# Altium PCB PCB1.PcbDoc
Units mm, origin at the board's own origin, x right, y up, seen from the top; angles counter-clockwise.
Board outline 100 x 50 mm, 2 copper layers (Top Layer, Bottom Layer), stack 1.98 mm thick; 15 components, 9 nets, 48 pads, 4 vias.
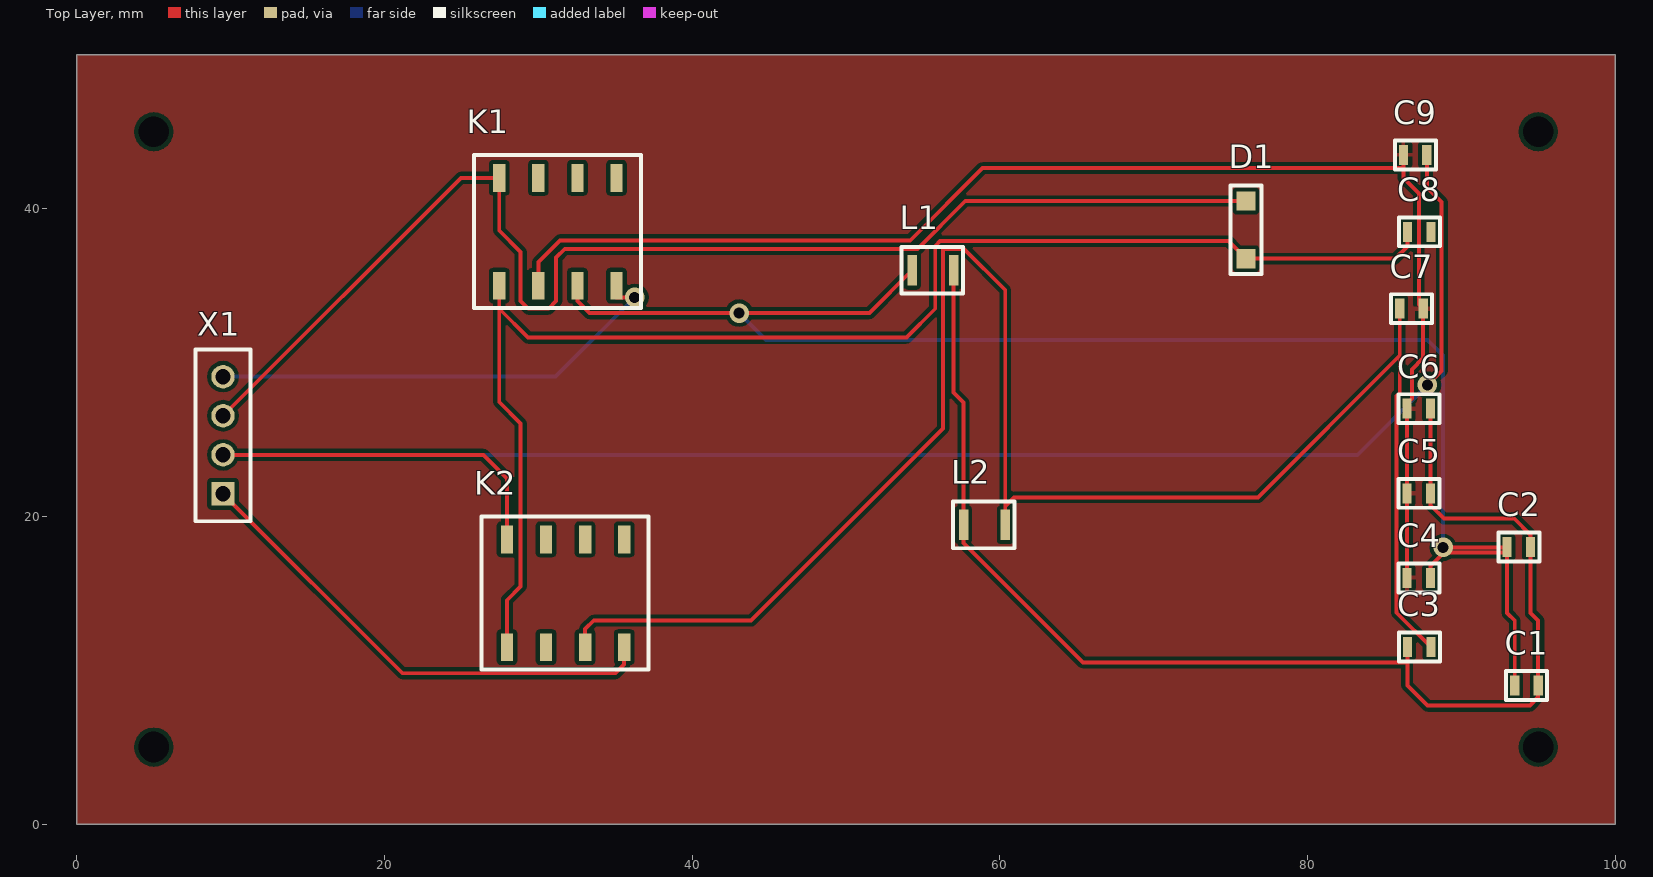
[diagram p0: Top Layer view]
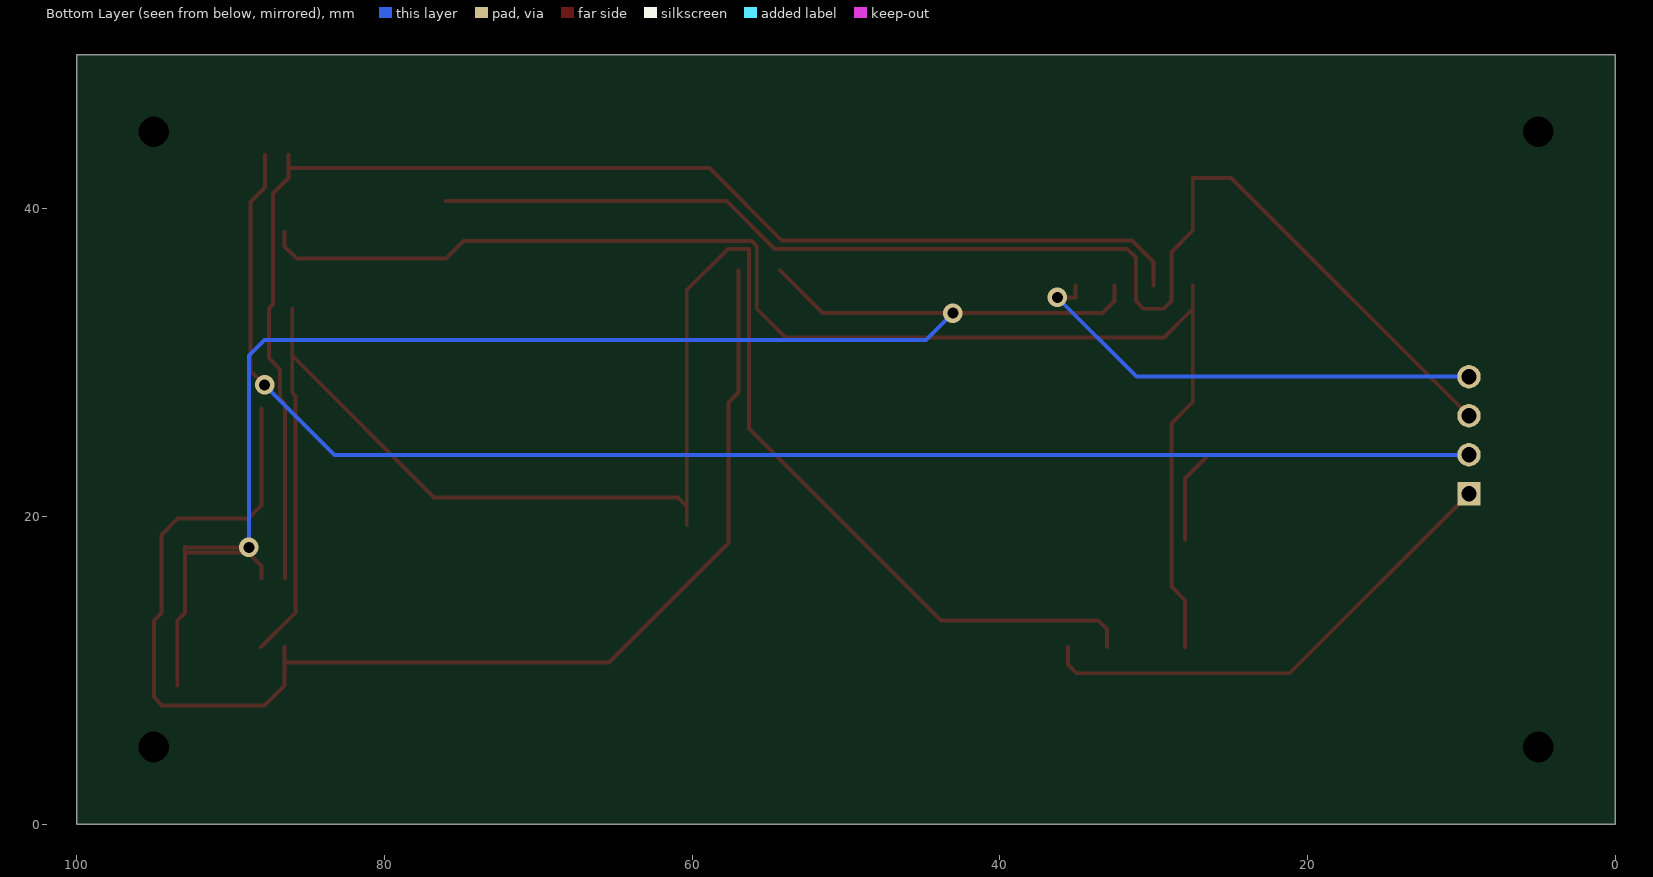
[diagram p1: Bottom Layer view, seen from below]
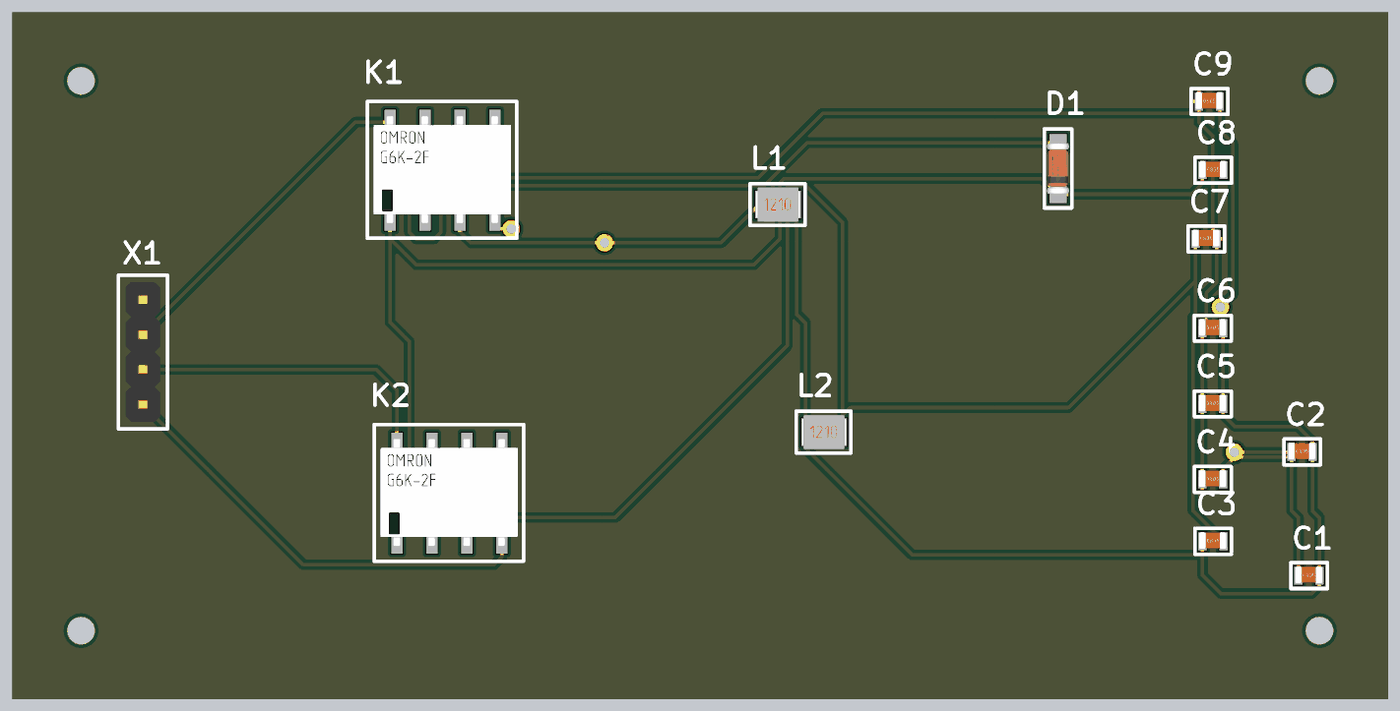
[diagram p2: 3D render of the assembled board from above, using the file's embedded part models]

## Layer stack, top to bottom
Top Solder: solder mask 0.0102, Solder Resist, Dk 3.5
Top Layer: signal copper 0.0356
Dielectric 1: dielectric 1.909, FR-4, Dk 4.8
Bottom Layer: signal copper 0.0356
Bottom Solder: solder mask 0.0102, Solder Resist, Dk 3.5

## Board outline
0,0 100,0 100,50 0,50

## Design rules (kind name [scope] priority, off if disabled: settings)
Clearance [All] p1: gap=0.254 ignorepadtopadclearanceinfootprint=FALSE except(0: Arc-Hole Track-Hole SMDPad-Hole THPad-Hole Via-Hole Fill-Hole Poly-Hole Region-Hole Text-Hole)
PolygonConnect [All] p1: connectstyle=Relief reliefconductorwidth=0.254 reliefentries=4 polygonreliefangle="90 Angle" airgapwidth=0.254
RoomDefinition Sheet1 [InComponentClass('Sheet1')] p1: confinementstyle=ConfineIn formatcopy=TRUE lockcomponents=FALSE outline -125,-125 -74.2,-125 -74.2,-99.6 -125,-99.6
RoutingVias [All] p1: holewidth=0.711 width=1.27 viastyle="Through Hole" minholewidth=0.711 minwidth=1.27 maxholewidth=0.711 maxwidth=1.27
SolderMaskExpansion [All] p1: expansion=0.102
Width [All] p1: maxlimit=0.254 minlimit=0.254 preferedwidth=0.254
30 further rules are at their usual default settings.

## Components (designator, comment, footprint, x,y, rotation, side; value= is the part's Value field where it differs from the comment)
C1 "12пФ-5%-1210" Capacitor_0805 94.238,9 r0 top
C2 "10пФ-10%-1210" Capacitor_0805 93.738,18 r0 top
C3 "10пФ-5%-1210" Capacitor_0805 87.262,11.5 r0 top
C4 "100пФ-5%-1210" Capacitor_0805 87.238,16 r0 top
C5 "150 пФ-5%-1210" Capacitor_0805 87.238,21.5 r0 top
C6 "82пФ-5%-1210" Capacitor_0805 87.238,27 r0 top
C7 "100 пФ-5%-1210" Capacitor_0805 86.762,33.5 r0 top
C8 "0.01 мкФ-10%-1210" Capacitor_0805 87.262,38.5 r0 top
C9 "0.01 мкФ-10%-1210" Capacitor_0805 87,43.5 r0 top
D1 "1N4148" 1N4148_MELF 76,36.75 r90 top
K1 "Relay_G6K-2F" Relay_G6K-2F 27.46,35 r0 top
K2 "Relay_G6K-2F" Relay_G6K-2F 27.96,11.5 r0 top
L1 "0.41 мкГн" Inductor_1210L 55.65,36.05 r0 top
L2 "0.47 мкГн" Inductor_1210L 59,19.5 r0 top
X1 "\"Разъёмы\"" PLS-1x4 9.5,21.46 r90 top

## Footprints (in the part's own frame and the unit in brackets; to place one, negate y for a bottom-side part, rotate by r counter-clockwise, add the part's x,y. Pads: shape width x height; smd on the part's side, far side on the other; paste and mask are expansions set on the pad)
1N4148_MELF [mm]
  rect 1.25x1.25 smd: 1(0,0) 2(3.75,0)
  silkscreen extent -1,-1 4.75,1, body extent 0.02,-0.8 3.72,0.8, height 1.6
Capacitor_0805 [mm]
  rect 0.6x1.3 smd: 0(-0.762,0) 1(0.762,0)
  silkscreen extent -1.32,-0.94 1.35,0.94, body extent -1.02,-0.56 0.98,0.69, height 1.3
Inductor_1210L [mm]
  rect 0.6x2 smd: 1(-1.35,-0.05) 2(1.35,-0.05)
  silkscreen extent -2.03,-1.57 1.96,1.47, body extent -1.6,-1.3 1.6,1.2, height 2.21
PLS-1x4 [mil]
  rect 60x60 hole 39.37: 1(0,0)
  round 60 hole 39.37: 2(100,0) 3(200,0) 4(300,0)
  silkscreen extent -70,-70 370,70, body extent -50,-50 350,50, height 335
Relay_G6K-2F [mm]
  rect 0.8x1.8 smd: 1(0,0) 2(2.54,0) 3(5.08,0) 4(7.62,0) 5(7.62,7) 6(5.08,7) 7(2.54,7) 8(0,7)
  silkscreen extent -1.65,-1.45 9.2,8.5, body extent -1.2,-0.35 8.8,7.45, height 5.21

## Part data
C1: library part Capasitor_SMD1210C, Manufacturer="Kyocera AVX", PartNumber=KGQ32DCG2D120JT, Href=https://www.chipdip.ru/product0/8044209417
C2 C3: library part Capasitor_SMD1210C, Manufacturer="Kemet Electronics", PartNumber=C1210C100K9RACTU, Href=https://www.chipdip.ru/product0/8018630498
C4 C7: library part Capasitor_SMD1210C, Manufacturer="Murata Electronics", PartNumber=GRM32A7U3D101JW31D, Href=https://www.chipdip.ru/product0/8015826902
C5: library part Capasitor_SMD1210C, Manufacturer="Kemet Electronics", PartNumber=C1210X151J1HACAUTO, Href=https://www.chipdip.ru/product0/8007765044
C6: library part Capasitor_SMD1210C, Manufacturer="Murata Electronics", PartNumber=GRM32A7U3D820JW31D, Href=https://www.chipdip.ru/product0/8006256032
C8 C9: library part Capasitor_SMD1210C, Manufacturer="Murata Electronics", PartNumber=GRM32DR72E104KW01L, Href=https://www.chipdip.ru/product/grm32dr72e104k
D1: library part Diode_1N4148
L1 L2: library part Inductor_1210
X1: library part PLS-1x4, PartNumber=DS-1021-1x4SF11-B, Href=https://www.chipdip.ru/product/pls-4?utm_source=direct&utm_medium=cpc&utm_campaign=Y_dinamicheskaya&utm_content=text1_ya&utm_term=---autotargeting&position_type=premium&yclid=14280046024007876607

## Free pads (board coordinates)
  round 0 hole 2: 6(5,5) 6(5,45) 6(95,5) 6(95,45)

## Via types
v1: diameter 1.27, hole 0.711, Top Layer to Bottom Layer, 4 vias

## Nets (pads, with @x,y where several pads share a name; then routed paths per layer and width w, separated by ;. In a path a pad name is that pad's centre, name@x,y a point inside that pad or via, vN(x,y) a via of type N, cw(c..) or ccw(c..) an arc to the next point about the centre after c; other vN are vias at no path point)
GND: C4.0 C5.0 C6.0 C7.1 C9.0 K1.2 | length 88.8
  Top Layer w0.254: K1.2 30,36.544 31.397,37.941 54.178,37.941 58.877,42.64 86.238,42.64 ; C9.0 86.238,42.64 ; C4.0 C5.0 C6.0 86.476,27.35 86.785,27.659 86.785,29.555 87.524,30.294 C7.1 87.242,33.782 87.242,40.989 86.238,41.993 86.238,42.64
NetC1_0: C1.0 C2.0 C4.1 K1.3 L1.1 | length 103.1
  Top Layer w0.254: K1.3 32.54,34.004 33.329,33.215 v1(43.048,33.215) 51.516,33.215 L1.1 ; C4.1 88,16.778 88.868,17.646 C2.0@92.976,17.646 ; v1(88.817,17.977) C2.0@92.976,17.977 ; C2.0 C2.0@92.976,17.977 ; C1.0 93.476,13.227 92.976,13.727 C2.0@92.976,17.646 ; C2.0@92.976,17.646 C2.0@92.976,17.977
  Bottom Layer w0.254: v1(43.048,33.215) 44.799,31.464 87.801,31.464 88.817,30.448 v1(88.817,17.977)
NetC1_1: C1.1 C2.1 C3.0 C5.1 C6.1 L1.2 L2.1 | length 86.2
  Top Layer w0.254: L1.2 57,28.05 57.65,27.4 L2.1 57.65,18.256 65.397,10.509 86.5,10.509 ; C3.0 86.5,10.509 ; C6.1 C5.1 88,20.724 88.868,19.856 93.44,19.856 94.5,18.796 C2.1 94.5,13.727 95,13.227 C1.1 95,8.244 94.456,7.7 87.816,7.7 86.5,9.016 86.5,10.509
NetC3_1: C3.1 C7.0 K2.3 L2.2 | length 114.6
  Top Layer w0.254: K2.3 33.04,12.668 33.6,13.228 43.835,13.228 56.319,25.712 56.319,37.381 57.677,37.381 60.35,34.708 60.35,20.65 ; L2.2 60.35,20.65 ; C7.0 86,30.448 ; C3.1 88.024,11.505 85.795,13.735 85.795,27.83 86,28.035 86,30.448 ; 60.35,20.65 60.928,21.228 76.78,21.228 86,30.448
NetC8_0: C8.0 D1.1 K1.1 K2.1 | length 91
  Top Layer w0.254: K1.1 27.46,33.496 ; K2.1 27.96,14.549 28.848,15.437 28.848,26.038 27.46,27.425 27.46,33.496 ; C8.0 86.5,37.554 85.696,36.75 D1.1 74.861,37.889 56.102,37.889 55.8,37.587 55.8,33.496 53.92,31.616 29.34,31.616 27.46,33.496
NetC9_1: C9.1 K2.8 X1.2 | length 119
  Top Layer w0.254: X1.2 26.431,24 27.96,22.471 K2.8 ; C9.1 87.762,41.384 88.716,40.43 88.716,29.457 v1(87.801,28.543)
  Bottom Layer w0.254: X1.2 83.258,24 v1(87.801,28.543)
NetD1_2: D1.2 K1.8 X1.3 | length 84.8
  Top Layer w0.254: X1.3 24.96,42 K1.8 27.46,38.576 28.848,37.188 28.848,34.004 29.356,33.496 30.651,33.496 31.159,34.004 31.159,36.823 31.718,37.382 54.635,37.382 57.753,40.5 D1.2
NetK1_4: K1.4 X1.4 | length 30.9
  Top Layer w0.254: K1.4 35.08,34.233 v1(36.265,34.233)
  Bottom Layer w0.254: X1.4 31.112,29.08 v1(36.265,34.233)
NetK2_4: K2.4 X1.1 | length 32.3
  Top Layer w0.254: X1.1 21.161,9.799 35.02,9.799 35.58,10.359 K2.4
pads on no net: C8.1 K1.5 K1.6 K1.7 K2.2 K2.5 K2.6 K2.7

## Polygon pours and split planes (outlines as drawn)
GND on Top Layer "Top Layer-No Net" (solid, pour order 6): 100,50 100,0 0,0 0,50

## Silkscreen, mask and mechanical layers (free items; w line width, h text height)
Border:
  lines w0.2: 100,0 0,0 0,50 100,50